# EAGLE board CityFireFly_2.0v (EAGLE 7.5.0)
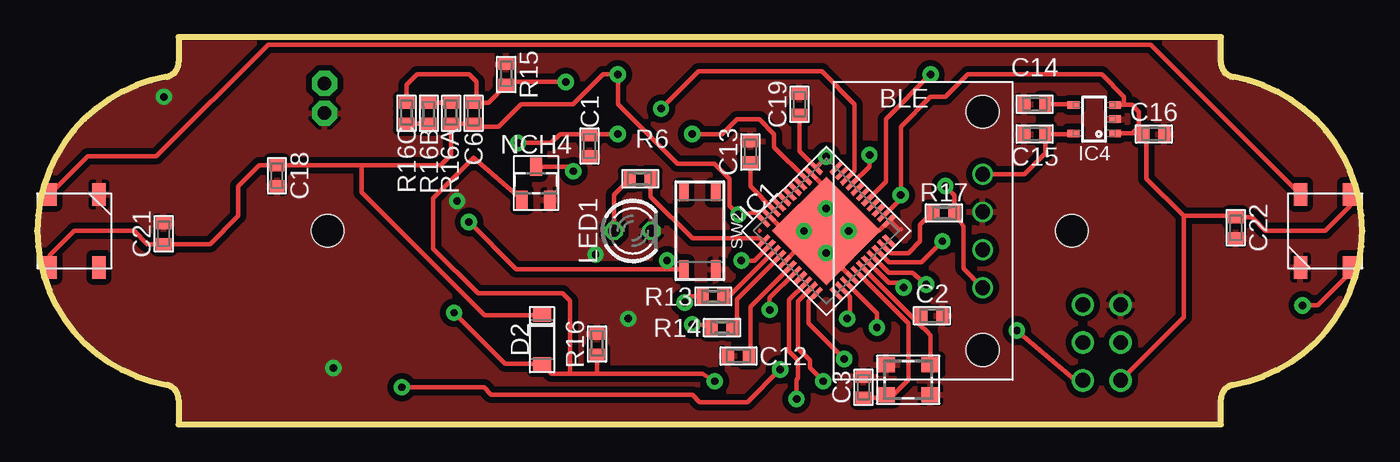
[diagram p0: board, top side]
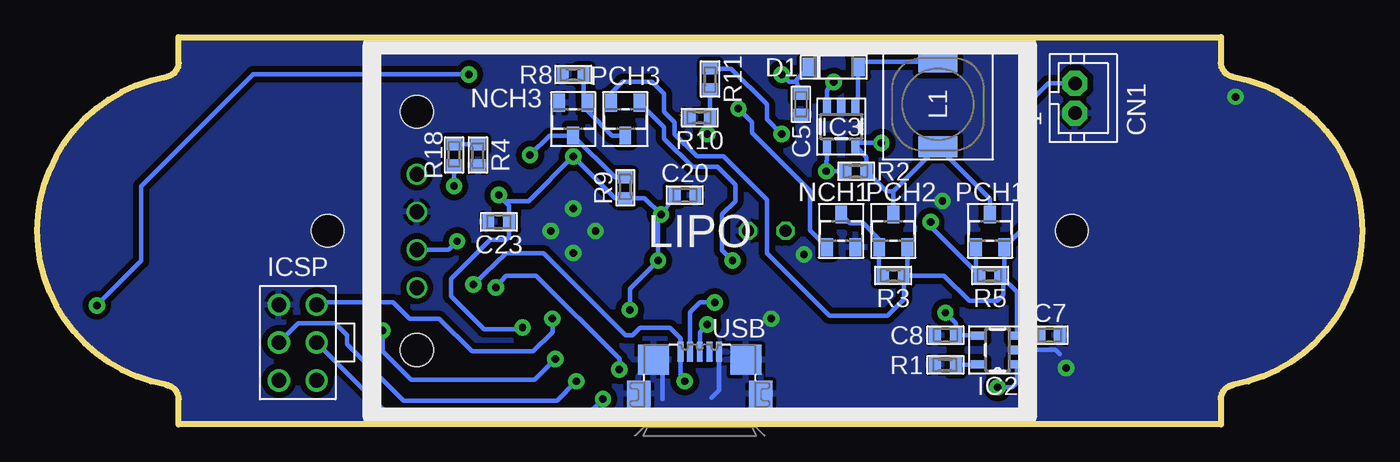
[diagram p1: board, bottom side, seen from below]

Size 89 x 26 mm. Coordinates in mm from the lower left corner, seen from the top.
Outline: 79.5,26 9.5,26 9.5,24.32 arc-80 8.67,23.34 arc160 8.67,2.66 arc-80 9.5,1.68 9.5,0 79.5,0 79.5,1.68 arc-80 80.33,2.66 arc160 80.33,23.34 arc-80 79.5,24.32 79.5,26
Copper layers (1*16): Top 0.035mm / dielectric 1.5mm / Bottom 0.035mm
Design rules "default *": minimum track width 0.2mm, minimum drill 0.4mm, track to track 0.4mm, track to pad 0.3mm, pad to pad 0.3mm, via to via 0.3mm, smd to smd 0.3mm, copper to edge 1mil, drill to drill 8mil, minimum pad ring 0.2mm, minimum via ring 0.3mm, stop-mask expansion 4mil, vias tented up to drill 0mil, thermal gap 10mil
Holes 2.2 mm at 19.5,13 69.5,13

## Footprints (pad centres in the part's own frame; a part is rotated, then mirrored left to right if it is on the bottom)
BLESERIAL2 = drill 1: 1 -3.81,-4; 2 -1.27,-4; 3 1.27,-4; 4 3.81,-4 | hole 2.2: -8,-4; 8,-4
1608 = smd 0.8 x 1: P$1 -0.7,0; P$2 0.7,0
JST-PH2 = drill 0.9 pad 1.676 octagon: 1 1,0; 2 -1,0
SOD_123 = smd 0.915 x 1.22: A -1.64,0; C 1.64,0
QFN-44-7X7 = smd 1.1 x 0.3: 1 -3.5,2.5; 2 -3.5,2; 3 -3.5,1.5; 4 -3.5,1; 5 -3.5,0.5; 6 -3.5,0; 7 -3.5,-0.5; 8 -3.5,-1; 9 -3.5,-1.5; 10 -3.5,-2; 11 -3.5,-2.5; 23 3.5,-2.5; 24 3.5,-2; 25 3.5,-1.5; 26 3.5,-1; 27 3.5,-0.5; 28 3.5,0; 29 3.5,0.5; 30 3.5,1; 31 3.5,1.5; 32 3.5,2; 33 3.5,2.5 | smd 0.3 x 1.1: 12 -2.5,-3.5; 13 -2,-3.5; 14 -1.5,-3.5; 15 -1,-3.5; 16 -0.5,-3.5; 17 0,-3.5; 18 0.5,-3.5; 19 1,-3.5; 20 1.5,-3.5; 21 2,-3.5; 22 2.5,-3.5; 34 2.5,3.5; 35 2,3.5; 36 1.5,3.5; 37 1,3.5; 38 0.5,3.5; 39 0,3.5; 40 -0.5,3.5; 41 -1,3.5; 42 -1.5,3.5; 43 -2,3.5; 44 -2.5,3.5 | smd 5.15 x 5.15: TH 0,0
SOT23-5L = smd 0.55 x 1: 1 -0.95,-1.3; 2 0,-1.3; 3 0.95,-1.3; 4 0.95,1.3; 5 -0.95,1.3
SSOP5-P-0.95 = smd 0.5 x 0.8: 1 -0.95,-1.4; 2 0,-1.4; 3 0.95,-1.4; 4 0.95,1.4; 5 -0.95,1.4
TOKO = smd 1.4 x 2.6: 1 -2.85,0; 2 2.85,0
3MM = drill 0.813 octagon: A 0,1.27; K 0,-1.27
NEO_FLAT = smd 1.5 x 0.9: 1 -2.45,1.65; 2 -2.45,-1.65; 3 2.45,-1.65; 4 2.45,1.65
SOT23 = smd 0.8 x 1.2: 1 -0.95,-1.1; 2 0.95,-1.1; 3 0,1.1
1608' = smd 0.8 x 1: 1 -0.7,0; 2 0.7,0
SKRP = smd 1.2 x 0.65: 1 -2.575,1.075; 2 2.575,1.075; 3 -2.575,-1.075; 4 2.575,-1.075
ICSP = drill 1 pad 1.5: 1 -1.27,2.54; 2 1.27,2.54; 3 -1.27,0; 4 1.27,0; 5 -1.27,-2.54; 6 1.27,-2.54
ZX62R-B-5P = smd 1.35 x 0.4: 1 2.875,-1.3; 2 2.875,-0.65; 3 2.875,0; 4 2.875,0.65; 5 2.875,1.3 | smd 1.8 x 1.6: M1 0.05,-4.1; M2 0.05,4.1 | smd 2 x 2.1: M3 2.35,3.1; M4 2.35,-3.1
FA-238 = smd 1.2 x 1: 1 -1.5,-1; 2 1.5,-1; 3 1.5,1; 4 -1.5,1

## Placement (x,y rotation side)
BLE_SERIAL2  BLE_SERIAL2  [BLESERIAL2]  59.5,13 90 top
C1  22uF  [1608]  37.1,18.7 270 top
C2  10pF  [1608]  60.1,7.3 0 top
C3  10pF  [1608]  55.5,2.5 90 top
C5  22uF  [1608]  37.7,21.5 270 bottom
C6  1nF  [1608]  29.3,20.9 90 top
C7  4.7uF  [1608]  21,6 0 bottom
C8  4.7uF  [1608]  28,6 180 bottom
C12  1uF  [1608]  47.1,4.6 0 top
C13  0.1uF  [1608]  47.9,18.3 90 top
C14  0.01uF  [1608]  67,21.5 180 top
C15  10uF  [1608]  67,19.5 180 top
C16  1uF  [1608]  75,19.5 0 top
C18  0.1uF  [1608]  16.1,16.7 270 top
C19  0.1uF  [1608]  51.2,21.5 90 top
C20  0.1uF  [1608]  45.5,15.4 0 bottom
C21  47uF  [1608]  8.5,12.8 90 top
C22  47uF  [1608]  80.5,13.2 270 top
C23  10uF  [1608]  58,13.6 180 bottom
CN1  [JST-PH2]  19.3,21.9 270 bottom
D1  SOD-123  [SOD_123]  35.5,24 180 bottom
D2  SOD-123  [SOD_123]  33.9,5.7 90 top
IC1  ATMEGA32U4  [QFN-44-7X7]  53,13 45 top
IC2  MCP73831  [SOT23-5L]  24.5,5 90 bottom
IC3  LM2735  [SOT23-5L]  35,20 180 bottom
IC4  TAR5SB  [SSOP5-P-0.95]  71,20.5 90 top
L1  D63  [TOKO]  28.5,21.5 90 bottom
LED1  3MMLED  [3MM]  40,13 90 top
LED2  NEO_FLAT  [NEO_FLAT]  86.5,13 270 top
LED3  NEO_FLAT  [NEO_FLAT]  2.5,13 90 top
NCH1  CHIP_FET  [SOT23]  35,13 0 bottom
NCH3  CHIP_FET  [SOT23]  53,20.5 180 bottom
NCH4  CHIP_FET  [SOT23]  33.5,16.2 0 top
PCH1  CHIP_FET_P  [SOT23]  25,13 0 bottom
PCH2  CHIP_FET_P  [SOT23]  31.5,13 0 bottom
PCH3  CHIP_FET_P  [SOT23]  49.5,20.5 180 bottom
R1  2K  [1608']  28,4 0 bottom
R2  100K  [1608']  34,17 0 bottom
R3  10K  [1608']  31.5,10 0 bottom
R4  470  [1608']  59.4,18.1 90 bottom
R5  10K  [1608']  25,10 0 bottom
R6  330  [1608']  40.5,16.5 0 top
R8  10K  [1608']  53,23.5 0 bottom
R9  10K  [1608']  49.5,15.9 270 bottom
R10  10K  [1608']  44.5,20.6 0 bottom
R11  1K  [1608']  43.8,23.2 90 bottom
R13  22  [1608']  45.4,8.6 180 top
R14  22  [1608']  46,6.5 180 top
R15  10K  [1608']  31.5,23.5 270 top
R16  10K  [1608']  37.6,5.4 270 top
R16A  10K  [1608']  27.8,20.9 270 top
R16B  10K  [1608']  26.3,20.9 90 top
R16C  10K  [1608']  24.8,20.9 270 top
R17  1K  [1608']  60.9,14.2 180 top
R18  1K  [1608']  61,18.1 270 bottom
SW2  SKRPACE010  [SKRP]  44.5,13 270 top
U$3  ICSP  [ICSP]  71.5,5.5 180 bottom
U$73  LIPO750MAH  [LIPO750MAH]  44.5,13 0 bottom
USB  MICRO-USB-KYORITU  [ZX62R-B-5P]  44.5,2 90 bottom
XTAL  FA-238  [FA-238]  58.5,3 0 top

## Library data of the parts
BLE_SERIAL2 = 12_module
C1-C3 C5-C8 C12-C16 C18-C23 = 02_C
CN1 = jst-ph (1)
D1 D2 = 15_DIODE
IC1-IC4 = 04_IC
L1 = 03_L
LED1-LED3 = 10_LED
NCH1 NCH3 NCH4 PCH1-PCH3 = 06_FET
R1-R6 R8-R11 R13-R16 R16A R16B R16C R17 R18 = 01_R
SW2 = 09_1_switch
U$3 = 08_CONECTOR
U$73 = 16_battery
USB = con-hirose1
XTAL = 09_2_CRYSTAL

## Nets
+3.3V: BLE_SERIAL2.4 C15.P$1 IC4.5
+3.7V: C1.P$1 IC3.5 L1.1 PCH1.3 PCH2.3 R2.2 R11.2
+5V: C5.P$1 C6.P$1 C16.P$1 C18.P$1 C19.P$1 C20.P$1 C21.P$1 C22.P$1 C23.P$1 D1.C D2.C IC1.2 IC1.7 IC1.14 IC1.24 IC1.34 IC1.44 IC4.1 IC4.3 LED2.1 LED3.1 R9.2 R16A.2 U$3.2
+USB5V: C8.P$1 D2.A IC1.19 IC2.4 NCH4.1 R16.2 USB.5
A1: IC1.37
A2: IC1.38
A3: IC1.39
A4: IC1.40
A5: IC1.41
ADC0: IC1.36 R10.2 R11.1
ATOM: BLE_SERIAL2.1 R17.1 R18.2
D0: BLE_SERIAL2.2 IC1.20
D1: IC1.21 R17.2
D4: IC1.25
D5: IC1.31 NCH1.1
D6: IC1.27 LED2.4
D7: IC1.1 R6.2
D8: IC1.28
D9: IC1.29
D10: IC1.30 NCH3.3 R9.1
D11: IC1.12
D12: IC1.26
D13: IC1.32
D+: R14.2 USB.3
D-: R13.2 USB.4
DOUT: LED2.2 LED3.4
FB: C6.P$2 IC3.3 R15.2 R16C.1
GND: BLE_SERIAL2.3 C1.P$2 C2.P$2 C3.P$2 C5.P$2 C7.P$2 C8.P$2 C12.P$1 C13.P$2 C14.P$2 C15.P$2 C16.P$2 C18.P$2 C19.P$2 C20.P$2 C21.P$2 C22.P$2 C23.P$2 CN1.1 IC1.5 IC1.15 IC1.23 IC1.35 IC1.43 IC1.TH IC2.2 IC3.2 IC4.2 LED1.K LED2.3 LED3.3 NCH1.2 NCH3.2 NCH4.2 R1.1 R4.1 R8.1 R10.1 R15.1 R16.1 SW2.2 U$3.6 USB.1 USB.M1 USB.M2 USB.M3 USB.M4 XTAL.2 XTAL.4
HWB: IC1.33
MISO: IC1.11 U$3.1
MOSI: IC1.10 U$3.4
N$1: LED1.A R6.1
N$2: IC2.5 R1.2
N$3: IC3.4 NCH4.3 R2.1
N$4: D1.A IC3.1 L1.2
N$5: R16A.1 R16B.2
N$6: NCH1.3 PCH2.1 R3.1
N$7: C3.P$1 IC1.16 XTAL.1
N$8: IC1.3 R13.1
N$9: C13.P$1 IC1.42
N$10: C2.P$1 IC1.17 XTAL.3
N$11: R16B.1 R16C.2
N$12: R4.2 R18.1
N$14: IC1.4 R14.1
N$16: C14.P$1 IC4.4
N$18: C12.P$2 IC1.6
RESET: IC1.13 U$3.5
RXLED: IC1.8
SCLK: IC1.9 U$3.3
SIG: NCH3.1 PCH3.3 R8.2
STAT: IC1.18 IC2.1
SWSIG: PCH1.1 PCH3.1 R5.1 SW2.4
TXLED: IC1.22
V2 [POWER]: C7.P$1 CN1.2 IC2.3 PCH1.2 PCH2.2 PCH3.2 R3.2 R5.2

## Tracks (layer width: path | path; a pad name or v marks a point on that pad's centre or on a via)
+3.3V
  Top 0.3: BLE_SERIAL2.4 66.31,16.81 67.7,18.2 C15.P$1 69.55,19.5 IC4.5
+3.7V  (via drill 0.5)
  Top 0.3: v32.3,18.9 34.5,18.9 35.1,19.5 37,19.5 | 37,19.5 v39,19.5 | 37,19.5 C1.P$1
  Bottom 0.3: 31.5,15.65 L1.1 25,15.15 PCH1.3 | 31.5,15.65 PCH2.3 31.5,14.7 | v32.3,18.9 33.85,18.9 IC3.5 33.3,17.95 R2.2 31.95,15.65 31.5,15.65 | v39,19.5 40,20.5 40,21.5 42.4,23.9 R11.2
+5V  (via drill 0.5)
  Top 0.3: 50.6,9.89 IC1.7 49.2,8.49 v49.2,7.7 | IC1.2 48.17,11 v47.3,11 | IC1.44 48.26,14.2 v47.1,14.1 46.5,14.7 46.5,16.5 45.5,17.5 43,17.5 39,21.5 v39,23.5 38,23.5 36,21.5 32.5,21.5 31,20 29.5,20 C6.P$1 R16A.2 27.8,18.1 27.1,17.4 21.8,17.4 | 21.8,17.4 C18.P$1 14.9,17.4 13.5,16 13.5,14 11.6,12.1 C21.P$1 7.4,12.1 6.5,13 2.5,13 0.85,11.35 LED3.1 | LED2.1 88.15,14.65 86.5,13 82.5,13 81.6,13.9 C22.P$1 80.4,14 77,14 | 77,14 77,7.19 U$3.2 | IC4.3 73,21.45 | 73,21.45 73.55,21.45 74,21 74,20 73.55,19.55 | 73.55,19.55 IC4.1 | 73.55,19.55 74.25,19.55 C16.P$1 74.5,19.3 74.5,16.5 77,14 | C19.P$1 51.2,18.34 IC1.34 53,17.95 v53,18 | 73,21.45 73,22 71.5,23.5 62.5,23.5 61,22 60,22 58,20 v58,15.4 58,15.17 IC1.24 | D2.C 30.06,7.34 21.8,15.6 21.8,17.4 | v56.4,6.5 56.4,7.48 IC1.14
  Bottom 0.3: v47.1,14.1 47.3,13.9 v47.3,11 49.2,9.1 v49.2,7.7 | D1.C 38,23.14 38,23 | 38,23 C5.P$1 | v39,23.5 38.5,23 38,23 | v47.1,14.1 48.2,15.2 R9.2 50.2,15.2 v53,18 56,15 57.6,15 v58,15.4 57.3,14.7 C23.P$1 57.3,12.6 57.5,12.4 58.6,12.4 61.2,9.8 61.2,8.6 59,6.4 56.5,6.4 v56.4,6.5 | C20.P$1 47,14.1 v47.1,14.1
+USB5V  (via drill 0.5)
  Top 0.3: v45.5,2.9 44.7,3.4 37.6,3.4 | 37.6,3.4 35.8,3.4 | 35.8,3.4 34.56,3.4 D2.A 31.44,4.06 v28,7.5 | IC1.19 57.21,10.2 58.8,10.2 v59.7,9.4 | R16.2 37.6,3.4 | NCH4.1 29.3,17.9 26.6,15.2 26.6,11.8 29.6,8.8 35.3,8.8 35.8,8.3 35.8,3.4
  Bottom 0.3: v45.5,2.9 45.8,3.2 USB.5 45.8,5.8 46.5,6.5 48.5,6.5 49,6 49.5,6 55,11.5 57.5,11.5 v59.7,9.4 | v28,7.5 27.3,6.8 C8.P$1 25.85,6 IC2.4
ADC0  (via drill 0.5)
  Top 0.3: v44,19.5 46,19.5 47,20.5 48.5,20.5 49.5,19.5 49.5,18.62 IC1.36
  Bottom 0.3: v44,19.5 43.8,19.7 R10.2 R11.1
ATOM  (via drill 0.5)
  Top 0.3: BLE_SERIAL2.1 62.2,10.49 62.2,13.3 R17.1 61.6,15.4 v61,16 61.3,15.7
  Bottom 0.3: v61,16 R18.2
D0  (via drill 0.5)
  Top 0.3: IC1.20 57.12,11 57.12,10.98 57.2,10.9 59.4,10.9 v60.8,12.3
  Bottom 0.3: BLE_SERIAL2.2 61.37,11.73 v60.8,12.3
D1
  Top 0.3: IC1.21 57.33,11.5 58.5,11.5 59.3,12.3 59.3,13.4 59.9,14 R17.2
D5  (via drill 0.5)
  Top 0.3: IC1.31 54.9,17.02 54.9,21.5 52.7,23.7 44.4,23.7 v41.9,21.2
  Bottom 0.3: NCH1.1 37.1,13.05 37.1,15.7 41,19.6 41,20.3 v41.9,21.2
D6  (via drill 0.5)
  Top 0.3: IC1.27 57,16.29 57,20.5 v60,23.5 | v85,8 86,8 88.15,10.15 LED2.4
  Bottom 0.3: v60,23.5 74.5,23.5 82,16 82,11 v85,8
D7
  Top 0.3: R6.2 41.2,15.3 44,12.5 48.55,12.5 IC1.1
D10  (via drill 0.5)
  Top 0.3: IC1.30 55.9,17.31 v55.9,18.1
  Bottom 0.3: R9.1 50.2,16.6 NCH3.3 54.6,19.4 v55.9,18.1
D+  (via drill 0.5)
  Top 0.3: R14.2 44.6,6.7 v44,6.7
  Bottom 0.3: v44,6.7 44.5,6.2 USB.3
D-  (via drill 0.5)
  Top 0.3: R13.2 43.9,8.6 v43.5,8.2
  Bottom 0.3: v43.5,8.2 44.5,8.2 45.15,7.55 USB.4
DOUT
  Top 0.3: LED3.4 3.4,18 8,18 15.5,25.5 74.8,25.5 LED2.2
FB  (via drill 0.5)
  Top 0.3: R16C.1 24.8,22.8 25.5,23.5 29,23.5 29.5,23 29.5,21.8 C6.P$2 30.3,21.6 R15.2 31.7,23 v35.5,23
  Bottom 0.3: v35.5,23 35.95,22.45 IC3.3
GND  (via drill 0.5)
  Top 0.3: IC1.43 50.17,13 v51.5,13 51.9,12.6 | IC1.5 51.9,12.6 | 51.9,12.6 51.99,12.7 52.4,12.7 52.7,13 IC1.TH | IC1.15 53.09,11.5 v53,11.5 | v53,14.5 53,15.83 IC1.35 | 58,13.1 57.85,13.1 IC1.23 56.54,13 v54.5,13
  Bottom 0.3: USB.1 43.2,2.3 43.7,1.8 | IC2.2 20.6,5 20.3,4.7 | USB.M3 47,3.75 47,1.7
  other vias: 28.2,15 37.5,11.4 19.9,3.8 8.5,22 39.7,7.1
  pour Bottom: -10.5,-1 -10.5,27 99.5,27 99.5,-1
  pour Top: -10.5,-1 -10.5,27 99.5,27 99.5,-1
MISO  (via drill 0.5)
  Top 0.3: v65.8,6.3 69.74,2.96 U$3.1 | v54.2,4.4 51.8,6.8 51.8,8.26 IC1.11
  Bottom 0.3: v65.8,6.3 65.8,4.9 63.9,3 55.6,3 v54.2,4.4
MOSI  (via drill 0.5)
  Top 0.3: v52.8,2.9 51.9,3.8 51.9,4.3 51.1,5.1 51.1,8.27 IC1.10
  Bottom 0.3: U$3.4 71.47,6.8 69,6.8 68.2,6 68.2,5.4 64.4,1.6 54.1,1.6 v52.8,2.9
N$1
  Top 0.3: LED1.A 38.73,15.43 R6.1
N$2
  Bottom 0.3: IC2.5 25.85,4 R1.2
N$3  (via drill 0.5)
  Top 0.3: v36,17 35.7,17.3 NCH4.3
  Bottom 0.3: IC3.4 35.95,17.75 36,17.7 v36,17 R2.1
N$4
  Bottom 0.3: IC3.1 33.86,21.99 D1.A 33.51,24.35 L1.2
N$5
  Top 0.3: R16B.2 R16A.1
N$6
  Bottom 0.3: NCH1.3 34.4,13.5 33.5,13.5 32.45,12.45 PCH2.1 32.45,10.25 R3.1
N$7
  Top 0.3: IC1.16 58.5,6.79 58.5,3 57.5,2 XTAL.1 56.8,1.8 C3.P$1
N$8
  Top 0.3: IC1.3 46.48,8.6 R13.1
N$9
  Top 0.3: IC1.42 47.9,15.98 C13.P$1
N$10
  Top 0.3: XTAL.3 60,6 59.75,6.25 59.4,6.6 | 59.4,6.6 IC1.17 | C2.P$1 59.4,6.6
N$11
  Top 0.3: R16C.2 R16B.1
N$12
  Bottom 0.3: R18.1 R4.2
N$14
  Top 0.3: IC1.4 47,8.41 47,7 46.7,6.7 R14.1
N$16
  Top 0.3: IC4.4 69.55,21.5 C14.P$1
N$18
  Top 0.3: IC1.6 47.9,7.9 47.9,4.7 C12.P$2
RESET  (via drill 0.5)
  Top 0.3: v54.4,7.1 54.6,7.3 54.6,8.57 IC1.13
  Bottom 0.3: U$3.5 70.07,8.2 65.1,8.2 64,7.1 62,7.1 59.8,4.9 55.7,4.9 54.4,6.2 v54.4,7.1
SCLK  (via drill 0.5)
  Top 0.3: IC1.9 50.5,8.38 50.5,4.9 51.1,4.3 51.1,3.1 51,3 v51,1.7
  Bottom 0.3: U$3.3 65.13,0.4 52.3,0.4 v51,1.7
SIG
  Bottom 0.3: PCH3.3 50.4,19.4 52.05,21.05 NCH3.1 52.3,21.85 R8.2
STAT  (via drill 0.5)
  Top 0.3: v24.5,2.5 30,2.5 30.5,2 44,2 44.5,1.5 47.7,1.5 v49.9,3.7 | IC1.18 57.21,9.5 58,9.5 v58.2,9.2
  Bottom 0.3: IC2.1 23.2,2.8 23.5,2.5 v24.5,2.5 | v58.2,9.2 57.5,10 55.5,10 49.9,4.4 v49.9,3.7
SWSIG  (via drill 0.5)
  Top 0.3: v29,13.6 32.18,10.43 42.3,10.43 | 42.3,10.43 SW2.4 | v42.3,11 42.3,10.43
  Bottom 0.3: R5.1 25.95,10.25 | 25.95,10.25 PCH1.1 | 25.95,10.25 29,13.3 v29,13.6 | PCH3.1 46.9,19.95 46.9,19.2 45,17.3 43.3,17.3 42.1,16.1 42.1,15 43,14.1 43,11.7 v42.3,11
V2
  Bottom 0.3: C7.P$1 23.15,6 IC2.3 23.2,8.9 R5.2 | R5.2 24.05,10.25 PCH1.2 22.5,13.45 22.5,21.5 21.1,22.9 CN1.2 | R3.2 30.55,10.25 PCH2.2 | R5.2 24.1,9.8 24.1,8.7 24.5,8.3 26.4,8.3 28.1,10 R3.2 | PCH3.2 50.45,22.25 49.7,23 47.7,23 46.9,22.2 46.9,21 46.2,20.3 46.2,19.5 44.7,18 42.9,18 40,15.1 40,11.5 35.8,7.3 31.9,7.3 30.8,8.4 R3.2